# Altium PCB COREV1.1_pcb5_0.PcbDoc (part 12 of 14)
Units mil, origin at the board's own origin, x right, y up, seen from the top; angles counter-clockwise.
Board outline 2860 x 2420 mil, 6 copper layers (Top Layer, GND, SIGNAL_1, SIGNAL_2, POWER, Bottom Layer); 110 components, 241 nets, 882 pads, 697 vias.
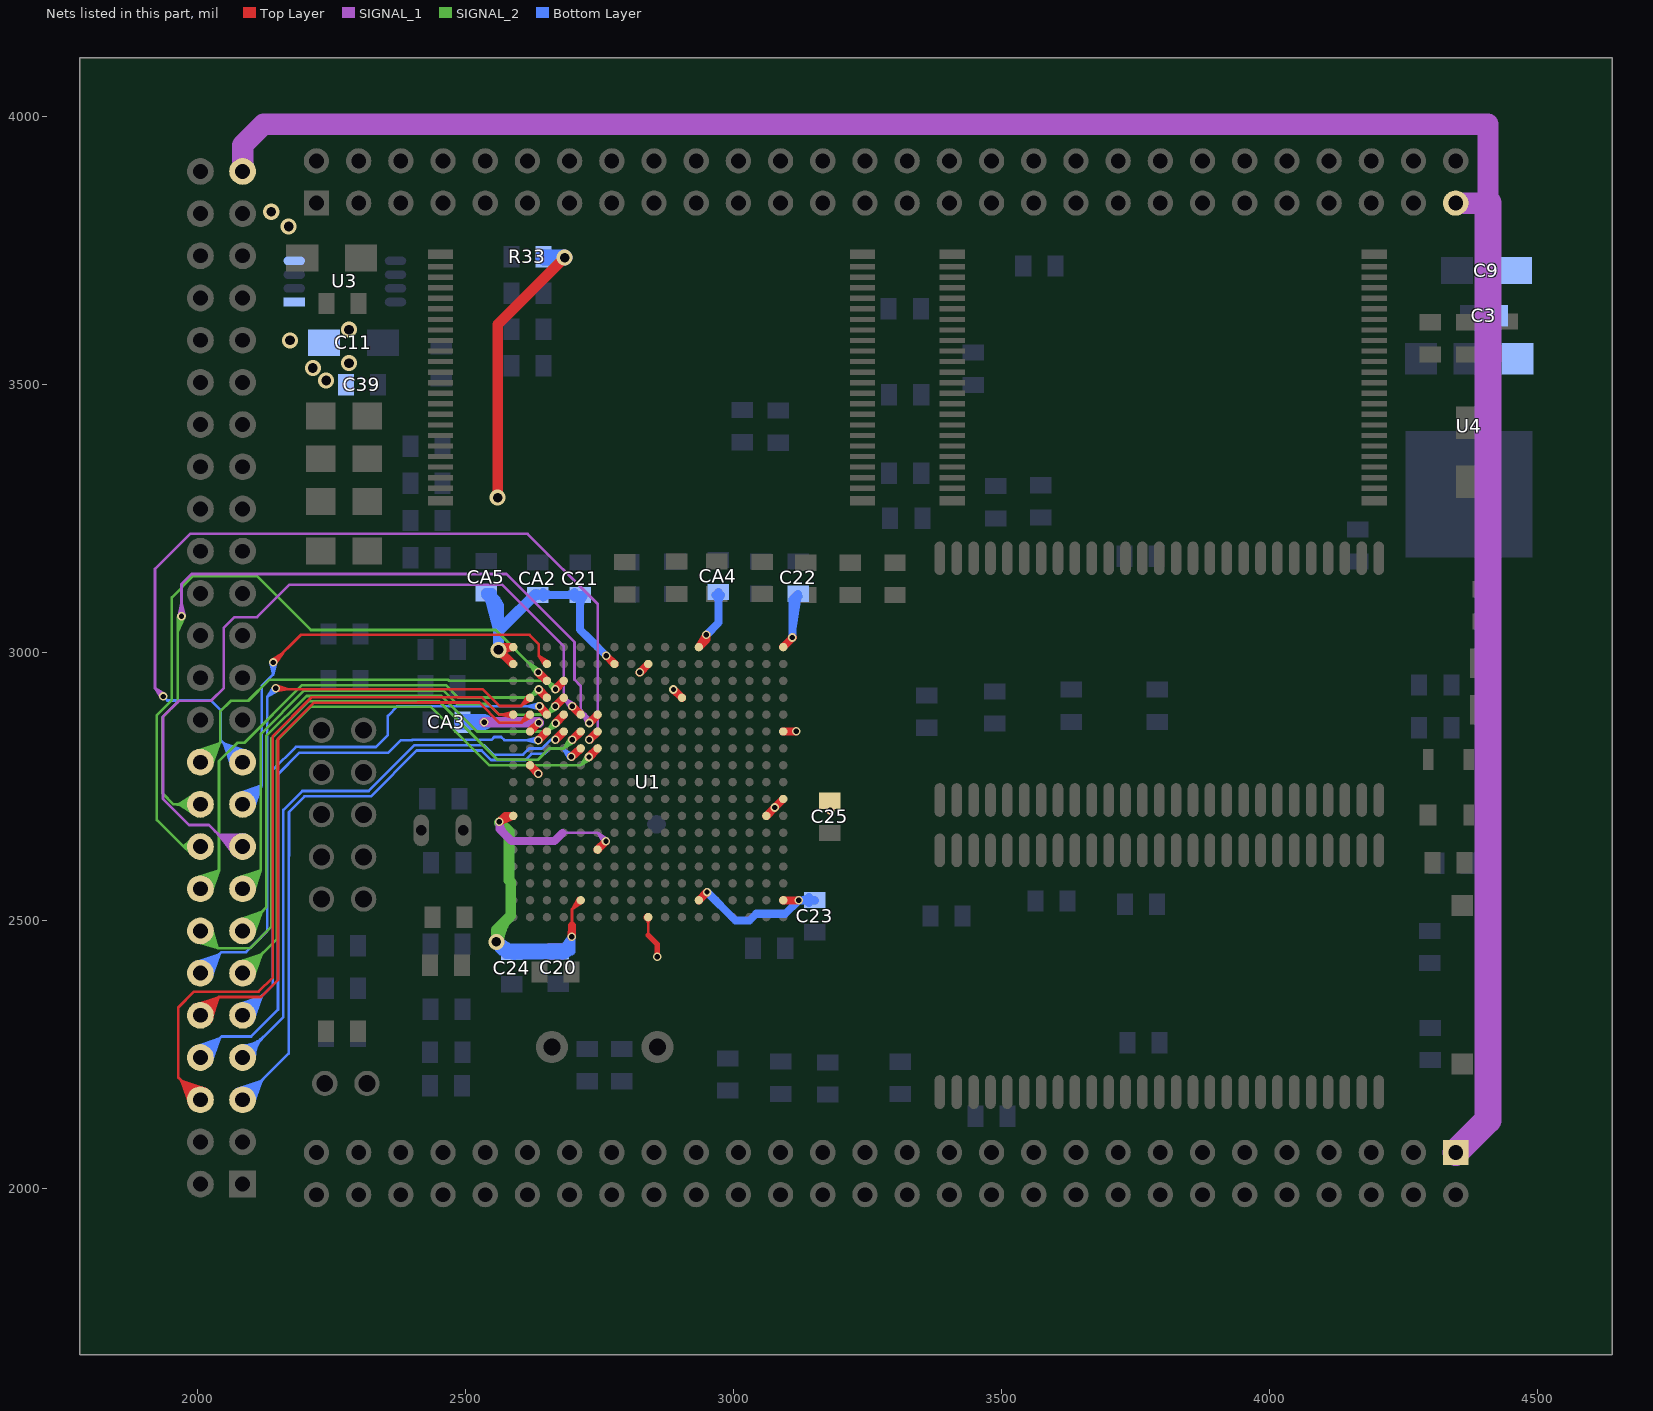
[diagram p16: the nets of this part, all layers, seen from the top]

## Via types
v1: diameter 16, hole 10, Top Layer to Bottom Layer, tented both sides, 638 vias
v2: diameter 30, hole 18, Top Layer to Bottom Layer, tented both sides, 56 vias
v3: diameter 16, hole 10, Top Layer to Bottom Layer, 2 vias
v4: diameter 30, hole 16, Top Layer to Bottom Layer, tented both sides, 1 vias

## Nets (pads, with @x,y where several pads share a name; then routed paths per layer and width w, separated by ;. In a path a pad name is that pad's centre, name@x,y a point inside that pad or via, vN(x,y) a via of type N, cw(c..) or ccw(c..) an arc to the next point about the centre after c; other vN are vias at no path point) (continued)
VD6: pad.PB21 U1.M6 | length 2699.5
  Top Layer w5: v1@2726.67,2840.62 U1.M6@2742.16,2855.92 ; v1@2728.8,2842.27 U1.M6@2749.7,2848.38 ; v1@2731,2842.72 ccw(c2731,2856) 2740.39,2846.61 ccw(c2749.78,2837.22) v1@2736.5,2837.22 ; v1@2734.39,2832.89 U1.M6@2749.7,2848.38 ; v1@2736.04,2835.02 U1.M6@2742.16,2855.92 ; U1.M6@2741.02,2852.62 cw(c2728.05,2852.62) 2737.22,2843.45 cw(c2746.4,2834.27) U1.M6@2746.4,2847.25 ; v1(2731,2837.22) U1.M6@2746.4,2852.62 ; v1(2731,2837.22) U1.M6@2742.16,2855.92 ; v1(2731,2837.22) U1.M6@2749.7,2848.38 ; v1(2731,2837.22) U1.M6@2746.4,2852.62 ; U1.M6@2746.4,2852.62 2735.35,2833.86 U1.M6@2746.4,2852.62 ; U1.M6@2746.4,2852.62 2727.63,2841.57 U1.M6@2746.4,2852.62
  SIGNAL_1 w5: v1@1930.5,2918 ccw(c1917.22,2918) 1926.61,2927.39 ccw(c1936,2936.78) v1@1936,2923.5 ; v1@1931.65,2914.63 1920.5,2933.5 ; v1@1939.37,2922.35 1920.5,2933.5 ; v1@2727.63,2841.57 2746.5,2852.72 ; v1(2731,2837.22) 2746.5,2852.72 ; v1@2731,2842.72 ccw(c2731,2856) 2740.39,2846.61 ccw(c2749.78,2837.22) v1@2736.5,2837.22 ; v1@2735.35,2833.85 2746.5,2852.72 ; 1920.5,2933.5 v1(1936,2918) 1920.5,2933.5 ; 1920.5,2933.5 1920.5,3156.1 1986,3221.6 2615.9,3221.6 2746.5,3091 2746.5,2852.72
  Bottom Layer w5: v1(1936,2918) 1943.62,2910.38 2025.26,2910.38 2043,2892.64 2043,2836.4 pad.PB21@2084,2795.4 ; pad.PB21@2061.5,2795.4 ccw(c2007.18,2795.4) 2045.59,2833.81 ccw(c2084,2872.22) pad.PB21@2084,2817.9 ; pad.PB21@2064.94,2783.45 2048.39,2831.01 ; pad.PB21@2066.5,2795.4 ccw(c2024.25,2795.4) 2054.13,2825.28 ccw(c2084,2855.15) pad.PB21@2084,2812.9 ; pad.PB21@2069.66,2785.37 2048.39,2831.01 ; pad.PB21@2071.5,2795.4 ccw(c2041.32,2795.4) 2062.66,2816.74 ccw(c2084,2838.08) pad.PB21@2084,2807.9 ; pad.PB21@2074.13,2787.73 2048.39,2831.01 ; pad.PB21@2078.32,2790.51 2048.39,2831.01 ; pad.PB21@2088.89,2801.09 2048.39,2831.01 ; pad.PB21@2091.67,2805.27 2048.39,2831.01 ; pad.PB21@2094.04,2809.74 2048.39,2831.01 ; pad.PB21@2095.95,2814.46 2048.39,2831.01
VD7: pad.PB22 U1.P3 | length 1750.9
  Top Layer w5: v1@2663.47,2934.9 U1.P3@2679.17,2950.42 ; v1@2665.57,2936.53 U1.P3@2686.72,2942.88 ; v1@2667.8,2937 ccw(c2667.8,2950.28) 2677.19,2940.89 ccw(c2686.57,2931.5) v1@2673.3,2931.5 ; v1@2671.2,2927.18 U1.P3@2686.72,2942.88 ; v1@2672.83,2929.28 U1.P3@2679.17,2950.42 ; U1.P3@2678.03,2947.11 cw(c2665.06,2947.11) 2674.23,2937.94 cw(c2683.41,2928.76) U1.P3@2683.41,2941.74 ; v1(2667.8,2931.5) U1.P3@2683.41,2947.11 ; v1(2667.8,2931.5) U1.P3@2679.17,2950.42 ; v1(2667.8,2931.5) U1.P3@2686.72,2942.88 ; v1(2667.8,2931.5) U1.P3@2683.41,2947.11 ; U1.P3@2683.41,2947.11 2672.14,2928.13 U1.P3@2683.41,2947.11 ; U1.P3@2683.41,2947.11 2664.42,2935.84 U1.P3@2683.41,2947.11
  SIGNAL_2 w5: pad.PB22@1993.31,2814.46 2040.87,2831.01 ; pad.PB22@1995.22,2809.74 2040.87,2831.01 ; pad.PB22@1997.59,2805.27 2040.87,2831.01 ; pad.PB22@2000.37,2801.09 2040.87,2831.01 ; pad.PB22@2005.26,2795.4 2042,2832.14 ; pad.PB22@2005.66,2807.9 ccw(c2006.52,2834.96) 2025.67,2815.81 ccw(c2044.82,2796.67) pad.PB22@2017.75,2795.8 ; pad.PB22@2005.82,2812.89 ccw(c2007.03,2850.78) 2033.83,2823.98 ccw(c2060.64,2797.17) pad.PB22@2022.75,2795.96 ; pad.PB22@2005.98,2817.89 ccw(c2007.54,2866.6) 2042,2832.14 ; pad.PB22@2010.94,2790.51 2040.87,2831.01 ; pad.PB22@2015.13,2787.73 2040.87,2831.01 ; pad.PB22@2019.6,2785.37 2040.87,2831.01 ; pad.PB22@2024.32,2783.45 2040.87,2831.01 ; pad.PB22@2027.75,2796.12 cw(c2076.46,2797.68) 2042,2832.14 ; v1@2662.3,2931.5 ccw(c2649.02,2931.5) 2658.41,2940.89 ccw(c2667.8,2950.28) v1@2667.8,2937 ; v1@2663.46,2928.11 2651.8,2947.5 ; v1@2671.18,2935.83 2651.8,2947.5 ; 2042,2832.14 2042,2890 2062,2910 2094.5,2910 2133.5,2949 2467.49,2949 2468.99,2947.5 2651.8,2947.5 ; 2651.8,2947.5 v1(2667.8,2931.5) 2651.8,2947.5
VD8: pad.PB19 U1.R2 | length 1663.8
  Top Layer w5: v1@2137.54,2985.77 2159.61,3000.11 v1@2145.27,2978.04 ; v1(2141,2981.5) 2192.5,3033 2619.26,3033 2636.54,3015.72 2636.54,2993.98 ; v1@2141,2987 ccw(c2141,3000.28) 2150.39,2990.89 ccw(c2159.78,2981.5) v1@2146.5,2981.5 ; U1.R2@2646.54,2978.61 ccw(c2633.56,2978.61) 2642.74,2987.78 ccw(c2651.91,2996.95) U1.R2@2651.91,2983.98 ; U1.R2@2647.67,2975.3 2636.54,2993.98 ; U1.R2@2655.21,2982.85 2636.54,2993.98 ; 2636.54,2993.98 U1.R2@2651.91,2978.61 2636.54,2993.98
  Bottom Layer w5: pad.PB19@2072.05,2735.72 2119.61,2752.27 ; pad.PB19@2073.96,2731 2119.61,2752.27 ; pad.PB19@2076.33,2726.53 2119.61,2752.27 ; pad.PB19@2079.11,2722.35 2119.61,2752.27 ; pad.PB19@2084,2716.66 2120,2752.66 ; pad.PB19@2084.59,2729.15 ccw(c2085.79,2754.87) 2104,2736.66 ccw(c2122.21,2718.45) pad.PB19@2096.49,2717.25 ; pad.PB19@2084.82,2734.14 ccw(c2086.51,2770.15) 2112,2744.66 ccw(c2137.49,2719.17) pad.PB19@2101.48,2717.48 ; pad.PB19@2085.05,2739.14 ccw(c2087.23,2785.43) 2120,2752.66 ; pad.PB19@2089.68,2711.77 2119.61,2752.27 ; pad.PB19@2093.87,2708.99 2119.61,2752.27 ; pad.PB19@2098.34,2706.63 2119.61,2752.27 ; pad.PB19@2103.06,2704.71 2119.61,2752.27 ; pad.PB19@2106.48,2717.72 cw(c2152.77,2719.89) 2120,2752.66 ; v1@2135.54,2980.83 2141,2959 ; v1@2137.11,2977.61 cw(c2127.72,2968.22) 2141,2968.22 cw(c2154.28,2968.22) v1@2144.89,2977.61 ; v1(2141,2981.5) 2141,2959 ; v1@2146.46,2980.83 2141,2959 ; 2120,2752.66 2120,2938 2141,2959
VD9: pad.PB20 U1.M5 | length 2598.6
  Top Layer w5: v1@2726.46,2871.9 U1.M5@2742.16,2887.43 ; v1@2728.55,2873.53 U1.M5@2749.71,2879.88 ; v1@2730.78,2874 ccw(c2730.78,2887.28) 2740.17,2877.89 ccw(c2749.56,2868.5) v1@2736.28,2868.5 ; v1@2734.18,2864.18 U1.M5@2749.71,2879.88 ; v1@2735.81,2866.27 U1.M5@2742.16,2887.43 ; U1.M5@2741.02,2884.12 cw(c2728.05,2884.12) 2737.22,2874.94 cw(c2746.4,2865.77) U1.M5@2746.4,2878.74 ; v1(2730.78,2868.5) U1.M5@2746.4,2884.12 ; v1(2730.78,2868.5) U1.M5@2742.16,2887.43 ; v1(2730.78,2868.5) U1.M5@2749.71,2879.88 ; v1(2730.78,2868.5) U1.M5@2746.4,2884.12 ; U1.M5@2746.4,2884.12 2735.12,2865.13 U1.M5@2746.4,2884.12 ; U1.M5@2746.4,2884.12 2727.41,2872.84 U1.M5@2746.4,2884.12
  SIGNAL_1 w5: v1@1964.54,3068.66 1970,3091 v1@1975.46,3068.66 ; v1@1966.11,3071.89 ccw(c1956.72,3081.28) 1970,3081.28 ccw(c1983.28,3081.28) v1@1973.89,3071.89 ; v1(1970,3068) 1970,3128 1988.6,3146.6 2576.44,3146.6 2703.5,3019.55 2703.5,2949.42 2714.9,2938.02 2714.9,2893.69 2730.78,2877.82 v1(2730.78,2868.5) 2716.49,2892.11 ; 2714.8,2893.79 cw(c2689.51,2868.5) v1@2725.28,2868.5 ; 2723.34,2885.26 cw(c2706.58,2868.5) v1@2730.28,2868.5 ; v1@2725.81,2866.13 2716.49,2892.11 ; 2731.87,2876.72 cw(c2723.65,2868.5) v1@2735.28,2868.5 ; v1@2735.18,2871.8 2716.49,2892.11
  SIGNAL_2 w5: 1962.76,3037.24 cw(c2000.76,3037.24) v1@1973.89,3064.11 ; 1962.76,3049.31 cw(c1988.69,3049.31) v1@1970.35,3067.65 ; 1962.76,3061.39 cw(c1976.61,3061.39) v1@1966.82,3071.18 ; v1@1964.56,3068.83 1962.76,3038.84 ; v1@1975.19,3066.19 1962.76,3038.84 ; pad.PB20@1988.4,2701.76 ccw(c1955.34,2672.54) 1955.34,2716.66 ; pad.PB20@1988.4,2731.56 cw(c1955.34,2760.79) 1955.34,2716.66 ; pad.PB20@1992.15,2705.07 ccw(c1966.43,2682.34) 1966.43,2716.66 ccw(c1966.43,2750.98) pad.PB20@1992.15,2728.25 ; pad.PB20@1995.89,2708.38 ccw(c1977.53,2692.15) 1977.53,2716.66 ccw(c1977.53,2741.18) pad.PB20@1995.89,2724.94 ; pad.PB20@1998.93,2695.07 1965.26,2716.66 ; pad.PB20@1998.93,2738.25 1965.26,2716.66 ; pad.PB20@2001.43,2699.59 1965.26,2716.66 ; pad.PB20@2001.43,2733.74 1965.26,2716.66 ; pad.PB20@2003.31,2704.32 1965.26,2716.66 ; pad.PB20@2003.31,2729.01 1965.26,2716.66 ; pad.PB20@2004.56,2709.2 1965.26,2716.66 ; pad.PB20@2004.56,2724.13 1965.26,2716.66 ; pad.PB20@2005.26,2716.66 1955.34,2716.66 ; 1955.34,2716.66 1934,2738 1934,2878.86 1962.76,2907.62 1962.76,3060.76 v1(1970,3068) 1962.76,3038.84
VD10: pad.PB17 U1.N5 | length 2491.8
  Top Layer w5: v1@2694.7,2896.59 U1.N5@2710.67,2880.8 ; v1@2696.76,2894.98 U1.N5@2718.22,2888.35 ; v1@2699.02,2894.5 cw(c2699.02,2881.22) 2708.41,2890.61 cw(c2717.8,2900) v1@2704.52,2900 ; v1@2702.43,2904.32 U1.N5@2718.22,2888.35 ; v1@2704.04,2902.26 U1.N5@2710.67,2880.8 ; U1.N5@2709.53,2884.12 ccw(c2696.55,2884.12) 2705.73,2893.29 ccw(c2714.9,2902.47) U1.N5@2714.9,2889.49 ; v1(2699.02,2900) U1.N5@2714.9,2884.12 ; v1(2699.02,2900) U1.N5@2718.22,2888.35 ; v1(2699.02,2900) U1.N5@2710.67,2880.8 ; v1(2699.02,2900) U1.N5@2714.9,2884.12 ; U1.N5@2714.9,2884.12 2695.64,2895.66 U1.N5@2714.9,2884.12 ; U1.N5@2714.9,2884.12 2703.36,2903.38 U1.N5@2714.9,2884.12
  SIGNAL_1 w5: 2032.46,2666.54 ccw(c2059.58,2693.65) pad.PB17@2074.97,2658.53 ; 2037.64,2661.36 ccw(c2062.73,2686.46) pad.PB17@2076.98,2653.95 ; 2042.82,2656.18 ccw(c2065.89,2679.26) pad.PB17@2078.98,2649.37 ; 2047.99,2651.01 ccw(c2069.04,2672.06) pad.PB17@2080.99,2644.79 ; 2053.17,2645.83 ccw(c2072.2,2664.86) pad.PB17@2083,2640.21 ; 2058.35,2640.65 ccw(c2075.35,2657.66) pad.PB17@2085,2635.63 ; pad.PB17@2069.82,2620.46 2039.13,2659.87 ; pad.PB17@2073.68,2623.79 2039.13,2659.87 ; pad.PB17@2077.15,2627.47 2039.13,2659.87 ; pad.PB17@2080.21,2631.45 2039.13,2659.87 ; pad.PB17@2086.78,2644.89 2039.13,2659.87 ; pad.PB17@2088.04,2649.75 2039.13,2659.87 ; pad.PB17@2088.82,2654.75 2039.13,2659.87 ; pad.PB17@2089.08,2659.84 2039.13,2659.87 ; v1@2693.52,2900 ccw(c2680.24,2900) 2689.63,2909.39 ccw(c2699.02,2918.78) v1@2699.02,2905.5 ; v1@2694.67,2896.63 2683.5,2915.52 ; v1@2702.39,2904.35 2683.5,2915.52 ; 2039.13,2659.87 pad.PB17@2084,2637.92 2061.08,2637.92 2021,2678 1984,2678 1935.5,2726.5 1935.5,2880.36 1965.14,2910 2025,2910 2049,2934 2049,3046.5 2068.5,3066 2110.86,3066 2171.46,3126.6 2568.16,3126.6 2683.5,3011.26 2683.5,2915.52 ; 2683.5,2915.52 v1(2699.02,2900) 2683.5,2915.52
VD11: pad.PB18 U1.R3 | length 1998.5
  Top Layer w5: v1@2631.25,2959.51 U1.R3@2647.74,2943.72 ; v1@2632.12,2958.66 U1.R3@2651.39,2947.11 ; v1@2632.18,2958.62 U1.R3@2651.91,2947.11 ; v1@2633.29,2957.96 U1.R3@2655.17,2951.38 ; v1@2635.5,2957.5 cw(c2635.5,2944.22) 2644.89,2953.61 cw(c2654.28,2963) v1@2641,2963 ; v1@2638.85,2967.36 U1.R3@2655.17,2951.38 ; v1@2639.77,2966.46 U1.R3@2651.91,2947.11 ; v1@2639.84,2966.38 U1.R3@2651.39,2947.11 ; v1@2640.46,2965.37 U1.R3@2647.74,2943.72 ; 2641.85,2956.65 ccw(c2651.91,2966.71) U1.R3@2651.91,2952.48 ; 2643.1,2955.4 cw(c2634.82,2947.11) U1.R3@2646.54,2947.11 ; v1(2635.5,2963) U1.R3@2651.91,2947.11 ; v1(2635.5,2963) U1.R3@2655.17,2951.38 ; v1(2635.5,2963) U1.R3@2647.74,2943.72 ; v1(2635.5,2963) U1.R3@2651.39,2947.11 ; U1.R3@2651.39,2947.11 U1.R3@2651.91,2947.11
  SIGNAL_2 w5: pad.PB18@1984.01,2630.52 ccw(c1973.6,2626.9) 1973.6,2637.92 ; pad.PB18@1984.01,2645.32 cw(c1973.6,2648.95) 1973.6,2637.92 ; pad.PB18@1997.27,2616.89 1973.6,2637.92 ; pad.PB18@1997.27,2658.95 1973.6,2637.92 ; pad.PB18@2000.42,2621.1 1973.6,2637.92 ; pad.PB18@2000.42,2654.74 1973.6,2637.92 ; pad.PB18@2002.79,2625.67 1973.6,2637.92 ; pad.PB18@2002.79,2650.18 1973.6,2637.92 ; pad.PB18@2004.37,2630.47 1973.6,2637.92 ; pad.PB18@2004.37,2645.37 1973.6,2637.92 ; pad.PB18@2005.26,2637.92 1973.6,2637.92 ; v1@2630,2963 ccw(c2616.72,2963) 2626.11,2972.39 ccw(c2635.5,2981.78) v1@2635.5,2968.5 ; v1@2631.23,2959.54 2616.89,2981.61 ; v1@2638.96,2967.27 2616.89,2981.61 ; 1973.6,2637.92 1924,2687.52 1924,2883 1952,2911 1952,3103.06 1991.8,3142.86 2110.5,3142.86 2211.25,3042.11 2556.39,3042.11 v1(2635.5,2963) 2616.89,2981.61
VD12: pad.PB15 U1.P4 | length 1858.7
  Top Layer w5: v1@2662.97,2902.91 U1.P4@2679.18,2918.94 ; v1@2665,2904.5 U1.P4@2686.73,2911.39 ; v1@2667.28,2904.99 ccw(c2667.28,2918.27) 2676.67,2908.88 ccw(c2686.06,2899.49) v1@2672.78,2899.49 ; v1@2670.7,2895.18 U1.P4@2686.73,2911.39 ; v1@2672.29,2897.21 U1.P4@2679.18,2918.94 ; U1.P4@2678.03,2915.61 cw(c2665.06,2915.61) 2674.23,2906.44 cw(c2683.41,2897.27) U1.P4@2683.41,2910.24 ; v1(2667.28,2899.49) U1.P4@2683.41,2915.61 ; v1(2667.28,2899.49) U1.P4@2679.18,2918.94 ; v1(2667.28,2899.49) U1.P4@2686.73,2911.39 ; v1(2667.28,2899.49) U1.P4@2683.41,2915.61 ; U1.P4@2683.41,2915.61 2671.61,2896.1 U1.P4@2683.41,2915.61 ; U1.P4@2683.41,2915.61 2663.89,2903.82 U1.P4@2683.41,2915.61
  SIGNAL_2 w5: pad.PB15@2072.25,2578.37 2118,2593.18 ; pad.PB15@2074.08,2573.6 2118,2593.18 ; pad.PB15@2076.39,2569.09 2118,2593.18 ; pad.PB15@2079.13,2564.88 2118,2593.18 ; pad.PB15@2084,2559.18 2118,2593.18 ; pad.PB15@2085.12,2571.63 ccw(c2087.13,2593.83) 2102.89,2578.07 ccw(c2118.65,2562.31) pad.PB15@2096.45,2560.31 ; pad.PB15@2085.57,2576.61 ccw(c2088.38,2607.69) 2110.44,2585.62 ccw(c2132.51,2563.56) pad.PB15@2101.43,2560.75 ; pad.PB15@2086.02,2581.59 ccw(c2089.63,2621.55) 2118,2593.18 ; pad.PB15@2089.7,2554.31 2118,2593.18 ; pad.PB15@2093.91,2551.57 2118,2593.18 ; pad.PB15@2098.42,2549.27 2118,2593.18 ; pad.PB15@2103.19,2547.44 2118,2593.18 ; pad.PB15@2106.41,2561.2 cw(c2146.37,2564.81) 2118,2593.18 ; v1@2661.78,2899.49 cw(c2648.51,2899.49) 2657.89,2890.1 cw(c2667.28,2880.71) v1@2667.28,2893.99 ; v1@2662.92,2902.84 2652.29,2884.5 ; v1@2670.64,2895.13 2652.29,2884.5 ; 2118,2593.18 2118,2848.04 2198.96,2929 2459.21,2929 2484.21,2904 2542.65,2904 2562.66,2883.99 2629.86,2883.99 2630.37,2884.5 2652.29,2884.5 ; 2652.29,2884.5 v1(2667.28,2899.49) 2652.29,2884.5
VD13: pad.PB16 U1.R4 | length 1875.8
  Top Layer w5: v1@2632.19,2927.61 U1.R4@2647.67,2912.31 ; v1@2634.33,2925.96 U1.R4@2655.21,2919.85 ; v1@2636.52,2925.5 cw(c2636.52,2912.22) 2645.91,2921.61 cw(c2655.3,2931) v1@2642.02,2931 ; v1@2639.92,2935.33 U1.R4@2655.21,2919.85 ; v1@2641.57,2933.2 U1.R4@2647.67,2912.31 ; U1.R4@2646.54,2915.61 ccw(c2633.56,2915.61) 2642.74,2924.79 ccw(c2651.91,2933.96) U1.R4@2651.91,2920.99 ; v1(2636.52,2931) U1.R4@2651.91,2915.61 ; v1(2636.52,2931) U1.R4@2655.21,2919.85 ; v1(2636.52,2931) U1.R4@2647.67,2912.31 ; v1(2636.52,2931) U1.R4@2651.91,2915.61 ; U1.R4@2651.91,2915.61 2633.16,2926.65 U1.R4@2651.91,2915.61 ; U1.R4@2651.91,2915.61 2640.87,2934.37 U1.R4@2651.91,2915.61
  SIGNAL_2 w5: pad.PB16@1993.42,2578.31 2040,2593.92 ; pad.PB16@1995.29,2573.56 2040,2593.92 ; pad.PB16@1997.62,2569.07 2040,2593.92 ; pad.PB16@2000.38,2564.87 2040,2593.92 ; pad.PB16@2005.26,2559.18 2040,2593.92 ; pad.PB16@2006.18,2571.65 ccw(c2007.91,2595.13) 2024.56,2578.48 ccw(c2041.21,2561.83) pad.PB16@2017.73,2560.1 ; pad.PB16@2006.55,2576.63 ccw(c2008.97,2609.51) 2032.28,2586.2 ccw(c2055.59,2562.89) pad.PB16@2022.71,2560.47 ; pad.PB16@2006.91,2581.62 ccw(c2010.03,2623.89) 2040,2593.92 ; pad.PB16@2010.95,2554.3 2040,2593.92 ; pad.PB16@2015.15,2551.54 2040,2593.92 ; pad.PB16@2019.64,2549.21 2040,2593.92 ; pad.PB16@2024.39,2547.34 2040,2593.92 ; pad.PB16@2027.7,2560.84 cw(c2069.97,2563.95) 2040,2593.92 ; 2625.15,2920.79 cw(c2636.52,2909.42) v1@2636.52,2925.5 ; 2627.96,2923.59 ccw(c2620.55,2931) v1@2631.02,2931 ; v1@2632.31,2934.53 2620.36,2916 ; v1@2639.73,2926.53 2620.36,2916 ; 2040,2593.92 2040,2797.36 2074.28,2831.64 2087.46,2831.64 2194.82,2939 2463.35,2939 2486.35,2916 2620.36,2916 ; 2620.36,2916 v1(2636.52,2931) 2635.36,2931 2620.36,2916
VD14: pad.PB13 U1.P5 | length 2071.7
  Top Layer w5: v1@2663.6,2871.31 U1.P5@2679.17,2887.42 ; v1@2665.65,2872.97 U1.P5@2686.71,2879.88 ; v1@2668,2873.5 ccw(c2668,2885.06) 2676.17,2876.89 ; v1@2671.5,2863.76 U1.P5@2686.71,2879.88 ; v1@2673.07,2865.86 U1.P5@2679.17,2887.42 ; v1@2673.5,2868 cw(c2688.5,2868) U1.P5@2677.89,2878.6 ; U1.P5@2678.03,2884.12 cw(c2665.06,2884.12) 2674.23,2874.94 cw(c2683.41,2865.77) U1.P5@2683.41,2878.74 ; v1(2668,2868) U1.P5@2683.41,2884.12 ; v1(2668,2868) U1.P5@2679.17,2887.42 ; v1(2668,2868) U1.P5@2686.71,2879.88 ; v1(2668,2868) U1.P5@2683.41,2884.12 ; v1(2668,2868) v1@2668,2868.71 ; v1@2668,2868.71 U1.P5@2683.41,2884.12 ; v1@2668,2868.71 U1.P5@2679.17,2887.42 ; v1@2668,2868.71 U1.P5@2686.71,2879.88 ; v1@2668,2868.71 U1.P5@2683.41,2884.12 ; U1.P5@2683.41,2884.12 2672.41,2864.72 U1.P5@2683.41,2884.12 ; U1.P5@2683.41,2884.12 2664.52,2872.26 U1.P5@2683.41,2884.12
  SIGNAL_2 w5: pad.PB13@2072.05,2499.5 2119.61,2516.05 ; pad.PB13@2073.96,2494.78 2119.61,2516.05 ; pad.PB13@2076.33,2490.31 2119.61,2516.05 ; pad.PB13@2079.11,2486.12 2119.61,2516.05 ; pad.PB13@2084,2480.44 2128,2524.44 2128,2843.9 2203.1,2919 2455.07,2919 2521.53,2852.53 2652.53,2852.53 ; pad.PB13@2084,2492.94 ccw(c2084,2523.12) 2105.34,2501.78 ccw(c2126.68,2480.44) pad.PB13@2096.5,2480.44 ; pad.PB13@2084,2497.94 ccw(c2084,2540.19) 2113.87,2510.31 ccw(c2143.75,2480.44) pad.PB13@2101.5,2480.44 ; pad.PB13@2084,2502.94 ccw(c2084,2557.26) 2122.41,2518.85 ccw(c2160.82,2480.44) pad.PB13@2106.5,2480.44 ; pad.PB13@2089.68,2475.55 2119.61,2516.05 ; pad.PB13@2093.87,2472.77 2119.61,2516.05 ; pad.PB13@2098.34,2470.4 2119.61,2516.05 ; pad.PB13@2103.06,2468.49 2119.61,2516.05 ; v1@2662.5,2868 cw(c2649.22,2868) 2658.61,2858.61 cw(c2668,2849.22) v1@2668,2862.5 ; v1@2663.65,2871.37 2652.53,2852.53 ; v1@2671.37,2863.65 2652.53,2852.53 ; 2652.53,2852.53 v1(2668,2868) 2652.53,2852.53
VD15: pad.PB14 U1.N6 | length 2081
  Top Layer w5: v1@2694.71,2840.44 U1.N6@2710.7,2855.97 ; v1@2696.8,2842.04 U1.N6@2718.18,2848.36 ; v1@2699,2842.5 ccw(c2699,2855.78) 2708.39,2846.39 ccw(c2717.78,2837) v1@2704.5,2837 ; v1@2702.37,2832.65 U1.N6@2718.18,2848.36 ; v1@2703.31,2833.58 U1.N6@2714.9,2852.62 ; v1@2703.34,2833.63 U1.N6@2714.62,2852.62 ; v1@2704,2834.71 U1.N6@2710.7,2855.97 ; 2705.25,2843.25 cw(c2714.9,2833.6) U1.N6@2714.9,2847.25 ; 2705.93,2843.93 ccw(c2697.23,2852.62) U1.N6@2709.53,2852.62 ; v1(2699,2837) U1.N6@2714.9,2852.62 ; v1(2699,2837) U1.N6@2710.7,2855.97 ; v1(2699,2837) U1.N6@2718.18,2848.36 ; v1(2699,2837) U1.N6@2714.62,2852.62 ; U1.N6@2714.62,2852.62 2695.63,2841.34 U1.N6@2714.9,2852.62 ; U1.N6@2714.62,2852.62 U1.N6@2714.9,2852.62
  SIGNAL_2 w5: pad.PB14@1993.73,2461.12 2037.76,2447.94 ; pad.PB14@1995.47,2465.94 2037.76,2447.94 ; pad.PB14@1997.71,2470.48 2037.76,2447.94 ; pad.PB14@2000.41,2474.72 2037.76,2447.94 ; pad.PB14@2005.26,2480.44 2037.76,2447.94 ; pad.PB14@2006.82,2468.04 cw(c2009.29,2448.36) 2023.31,2462.39 cw(c2037.34,2476.41) pad.PB14@2017.66,2478.88 ; pad.PB14@2007.44,2463.08 cw(c2010.91,2435.53) 2030.54,2455.16 cw(c2050.16,2474.79) pad.PB14@2022.62,2478.26 ; pad.PB14@2008.07,2458.12 cw(c2012.52,2422.71) 2037.76,2447.94 ; pad.PB14@2010.98,2485.29 2037.76,2447.94 ; pad.PB14@2015.22,2487.99 2037.76,2447.94 ; pad.PB14@2019.76,2490.23 2037.76,2447.94 ; pad.PB14@2024.58,2491.97 2037.76,2447.94 ; pad.PB14@2027.58,2477.63 ccw(c2062.99,2473.18) 2037.76,2447.94 ; v1@2693.5,2837 cw(c2680.22,2837) 2689.61,2827.61 cw(c2699,2818.22) v1@2699,2831.5 ; v1@2694.67,2840.39 2683,2821 ; v1@2702.39,2832.67 2683,2821 ; 2037.76,2447.94 2097.46,2447.94 2138,2488.48 2138,2839.75 2207.25,2909 2450.93,2909 2560.05,2799.88 2634.88,2799.88 2656,2821 2683,2821 ; 2683,2821 v1(2699,2837) 2683,2821
VD16: pad.PB11 U1.M7 | length 2122.2
  Top Layer w5: v1@2725.97,2808.42 U1.M7@2742.18,2824.45 ; v1@2727.99,2810.01 U1.M7@2749.72,2816.9 ; v1@2730.28,2810.5 ccw(c2730.28,2823.78) 2739.67,2814.39 ccw(c2749.05,2805) v1@2735.78,2805 ; v1@2733.69,2800.69 U1.M7@2749.72,2816.9 ; v1@2735.28,2802.72 U1.M7@2742.18,2824.45 ; U1.M7@2741.02,2821.13 cw(c2728.05,2821.13) 2737.22,2811.95 cw(c2746.4,2802.78) U1.M7@2746.4,2815.75 ; v1(2730.28,2805) U1.M7@2746.4,2821.13 ; v1(2730.28,2805) U1.M7@2742.18,2824.45 ; v1(2730.28,2805) U1.M7@2749.72,2816.9 ; v1(2730.28,2805) U1.M7@2746.4,2821.13 ; U1.M7@2746.4,2821.13 2734.61,2801.61 U1.M7@2746.4,2821.13 ; U1.M7@2746.4,2821.13 2726.88,2809.33 U1.M7@2746.4,2821.13
  SIGNAL_2 w5: pad.PB11@2072.05,2420.76 2119.61,2437.31 ; pad.PB11@2073.96,2416.04 2119.61,2437.31 ; pad.PB11@2076.33,2411.57 2119.61,2437.31 ; pad.PB11@2079.11,2407.38 2119.61,2437.31 ; pad.PB11@2084,2401.7 2148,2465.7 2148,2835.61 2211.39,2899 2435,2899 2544.12,2789.88 2715.15,2789.88 ; pad.PB11@2084,2414.2 ccw(c2084,2444.38) 2105.34,2423.04 ccw(c2126.68,2401.7) pad.PB11@2096.5,2401.7 ; pad.PB11@2084,2419.2 ccw(c2084,2461.45) 2113.87,2431.57 ccw(c2143.75,2401.7) pad.PB11@2101.5,2401.7 ; pad.PB11@2084,2424.2 ccw(c2084,2478.52) 2122.41,2440.11 ccw(c2160.82,2401.7) pad.PB11@2106.5,2401.7 ; pad.PB11@2089.68,2396.81 2119.61,2437.31 ; pad.PB11@2093.87,2394.03 2119.61,2437.31 ; pad.PB11@2098.34,2391.66 2119.61,2437.31 ; pad.PB11@2103.06,2389.75 2119.61,2437.31 ; v1@2724.78,2805 cw(c2711.5,2805) 2720.89,2795.61 cw(c2730.28,2786.23) v1@2730.28,2799.5 ; v1@2725.92,2808.36 2715.15,2789.88 ; v1@2733.63,2800.65 2715.15,2789.88 ; 2715.15,2789.88 v1(2730.28,2805) 2715.15,2789.88
VD17: pad.PB12 U1.T4 | length 1977.3
  Top Layer w5: v1(2146,2933) 2169.11,2931.74 ; v1@2146.35,2927.51 2169.11,2931.74 ; v1@2146.95,2938.42 2169.11,2931.74 ; v1@2147.26,2931.74 2532,2931.74 2563.5,2900.24 2604.29,2900.24 ; v1@2149.89,2929.11 cw(c2156.23,2922.77) 2156.23,2931.74 ; v1@2149.89,2936.89 ccw(c2162.33,2949.33) 2162.33,2931.74 ; 2609.96,2905.91 cw(c2620.41,2895.46) U1.T4@2620.41,2910.24 ; 2611.77,2907.72 ccw(c2603.87,2915.61) U1.T4@2615.04,2915.61 ; U1.T4@2616.26,2919.03 2604.29,2900.24 ; U1.T4@2623.62,2911.31 2604.29,2900.24 ; 2604.29,2900.24 U1.T4@2620.41,2915.61 2619.66,2915.61 2604.29,2900.24
  Bottom Layer w5: pad.PB12@1993.31,2420.76 2040.87,2437.31 ; pad.PB12@1995.22,2416.04 2040.87,2437.31 ; pad.PB12@1997.59,2411.57 2040.87,2437.31 ; pad.PB12@2000.37,2407.38 2040.87,2437.31 ; pad.PB12@2005.26,2401.7 2044.36,2440.8 2090.32,2440.8 2130,2480.48 2130,2917 ; pad.PB12@2005.26,2414.2 ccw(c2005.26,2444.38) 2026.6,2423.04 ccw(c2047.94,2401.7) pad.PB12@2017.76,2401.7 ; pad.PB12@2005.26,2419.2 ccw(c2005.26,2461.45) 2035.13,2431.57 ccw(c2065.01,2401.7) pad.PB12@2022.76,2401.7 ; pad.PB12@2005.26,2424.2 ccw(c2005.26,2478.52) 2043.67,2440.11 ccw(c2082.08,2401.7) pad.PB12@2027.76,2401.7 ; pad.PB12@2010.94,2396.81 2040.87,2437.31 ; pad.PB12@2015.13,2394.03 2040.87,2437.31 ; pad.PB12@2019.6,2391.66 2040.87,2437.31 ; pad.PB12@2024.32,2389.75 2040.87,2437.31 ; v1@2140.5,2933 cw(c2127.22,2933) 2136.61,2923.61 cw(c2146,2914.22) v1@2146,2927.5 ; v1@2141.67,2936.39 2130,2917 ; v1@2149.39,2928.67 2130,2917 ; 2130,2917 v1(2146,2933) 2130,2917
VD18: pad.PB9 U1.R5 | length 2010.6
  Top Layer w5: v1@2633.44,2896.92 U1.R5@2647.45,2881.12 ; v1@2634.37,2895.87 U1.R5@2651.91,2884.12 ; v1@2634.73,2895.58 U1.R5@2651.16,2886.84 ; v1@2635.53,2895.09 U1.R5@2655.47,2888.14 ; v1@2638,2894.5 cw(c2638,2881.22) 2647.39,2890.61 cw(c2656.78,2900) v1@2643.5,2900 ; v1@2638,2898.03 v1(2638,2900) ; v1@2641.34,2896.66 cw(c2628.8,2884.12) U1.R5@2646.54,2884.12 ; v1@2641.66,2904.11 U1.R5@2655.47,2888.14 ; v1@2642.42,2903.27 U1.R5@2651.16,2886.84 ; v1@2642.57,2903.05 U1.R5@2651.91,2884.12 ; v1@2643.2,2901.8 U1.R5@2647.45,2881.12 ; 2646.1,2891.9 ccw(c2651.91,2897.71) U1.R5@2651.91,2889.49 ; v1(2638,2900) U1.R5@2651.91,2884.12 ; v1(2638,2900) U1.R5@2655.47,2888.14 ; v1(2638,2900) U1.R5@2647.45,2881.12 ; v1(2638,2900) U1.R5@2651.16,2886.84 ; U1.R5@2651.16,2886.84 2651.16,2884.12 U1.R5@2651.91,2884.12
  Bottom Layer w5: pad.PB9@2072.05,2342.02 2119.61,2358.57 ; pad.PB9@2073.96,2337.3 2119.61,2358.57 ; pad.PB9@2076.33,2332.83 2119.61,2358.57 ; pad.PB9@2079.11,2328.64 2119.61,2358.57 ; pad.PB9@2084,2322.96 2140,2378.96 2140,2780.5 2183.43,2823.93 2191.71,2823.93 2191.85,2823.79 2332.79,2823.79 2355,2846 2355,2881.75 2373.25,2900 v1(2638,2900) ; pad.PB9@2084,2335.46 ccw(c2084,2365.64) 2105.34,2344.3 ccw(c2126.68,2322.96) pad.PB9@2096.5,2322.96 ; pad.PB9@2084,2340.46 ccw(c2084,2382.71) 2113.87,2352.83 ccw(c2143.75,2322.96) pad.PB9@2101.5,2322.96 ; pad.PB9@2084,2345.46 ccw(c2084,2399.78) 2122.41,2361.37 ccw(c2160.82,2322.96) pad.PB9@2106.5,2322.96 ; pad.PB9@2089.68,2318.07 2119.61,2358.57 ; pad.PB9@2093.87,2315.29 2119.61,2358.57 ; pad.PB9@2098.34,2312.92 2119.61,2358.57 ; pad.PB9@2103.06,2311.01 2119.61,2358.57 ; v1@2634.11,2896.11 ccw(c2624.72,2886.72) 2624.72,2900 ccw(c2624.72,2913.28) v1@2634.11,2903.89 ; v1@2637.34,2894.54 2615,2900 v1@2637.34,2905.46
VD19: pad.PB10 U1.T5 | length 1779.5
  Top Layer w5: pad.PB10@1993.51,2342.15 2039.3,2357 ; pad.PB10@1995.34,2337.38 2039.3,2357 ; pad.PB10@1997.64,2332.87 2039.3,2357 ; pad.PB10@2000.39,2328.66 2039.3,2357 ; pad.PB10@2005.26,2322.96 2039.3,2357 ; pad.PB10@2006.37,2335.41 ccw(c2008.36,2357.68) 2024.17,2341.87 ccw(c2039.98,2326.06) pad.PB10@2017.71,2324.07 ; pad.PB10@2006.82,2340.39 ccw(c2009.6,2371.57) 2031.73,2349.43 ccw(c2053.87,2327.3) pad.PB10@2022.69,2324.52 ; pad.PB10@2007.26,2345.37 ccw(c2010.84,2385.45) 2039.3,2357 ; pad.PB10@2010.96,2318.09 2039.3,2357 ; pad.PB10@2015.17,2315.34 2039.3,2357 ; pad.PB10@2019.68,2313.04 2039.3,2357 ; pad.PB10@2024.45,2311.21 2039.3,2357 ; pad.PB10@2027.67,2324.96 cw(c2067.75,2328.54) 2039.3,2357 ; 2411,2906.5 2217,2906.5 2150,2839.5 2150,2388.86 2118.14,2357 2039.3,2357 ; 2411,2906.64 2525.87,2906.64 2563.77,2868.74 2604.29,2868.74 ; 2609.96,2874.42 cw(c2620.41,2863.96) U1.T5@2620.41,2878.74 ; 2611.77,2876.22 ccw(c2603.87,2884.12) U1.T5@2615.04,2884.12 ; U1.T5@2616.26,2887.53 2604.29,2868.74 ; U1.T5@2623.62,2879.81 2604.29,2868.74 ; 2604.29,2868.74 U1.T5@2620.41,2884.12 2619.66,2884.12 2604.29,2868.74
VD20: pad.PB7 U1.P6 | length 1575.2
  Top Layer w5: v1@2663.46,2840.4 U1.P6@2679.17,2855.93 ; v1@2665.56,2842.03 U1.P6@2686.72,2848.39 ; v1@2667.78,2842.5 ccw(c2667.78,2855.78) 2677.17,2846.39 ccw(c2686.56,2837) v1@2673.28,2837 ; v1@2671.18,2832.68 U1.P6@2686.72,2848.39 ; v1@2672.81,2834.77 U1.P6@2679.17,2855.93 ; U1.P6@2678.03,2852.62 cw(c2665.06,2852.62) 2674.23,2843.45 cw(c2683.41,2834.27) U1.P6@2683.41,2847.25 ; v1(2667.78,2837) U1.P6@2683.41,2852.62 ; v1(2667.78,2837) U1.P6@2679.17,2855.93 ; v1(2667.78,2837) U1.P6@2686.72,2848.39 ; v1(2667.78,2837) U1.P6@2683.41,2852.62 ; U1.P6@2683.41,2852.62 2672.13,2833.63 U1.P6@2683.41,2852.62 ; U1.P6@2683.41,2852.62 2664.41,2841.34 U1.P6@2683.41,2852.62
  Bottom Layer w5: pad.PB7@2084,2244.22 2160,2320.22 2160,2706 2195.5,2741.5 2319.24,2741.5 2404.74,2827 2534.43,2827 2551.93,2809.5 2607.43,2809.5 2618.93,2821 2642.86,2821 2658.86,2837 v1(2667.78,2837) ; pad.PB7@2084,2256.72 ccw(c2084,2286.9) 2105.34,2265.56 ccw(c2126.68,2244.22) pad.PB7@2096.5,2244.22 ; pad.PB7@2084,2261.72 ccw(c2084,2303.97) 2113.87,2274.09 ccw(c2143.75,2244.22) pad.PB7@2101.5,2244.22 ; pad.PB7@2084,2266.72 ccw(c2084,2321.04) 2122.41,2282.63 ccw(c2160.82,2244.22) pad.PB7@2106.5,2244.22
VD21: pad.PB8 U1.R6 | length 2144.8
  Top Layer w5: v1@2631.48,2839.92 U1.R6@2647.69,2855.95 ; v1@2633.5,2841.5 U1.R6@2655.24,2848.4 ; v1@2635.79,2842 ccw(c2635.79,2855.28) 2645.18,2845.89 ccw(c2654.57,2836.5) v1@2641.29,2836.5 ; v1@2639.2,2832.19 U1.R6@2655.24,2848.4 ; v1@2640.79,2834.22 U1.R6@2647.69,2855.95 ; U1.R6@2646.54,2852.62 cw(c2633.56,2852.62) 2642.74,2843.45 cw(c2651.91,2834.27) U1.R6@2651.91,2847.25 ; v1(2635.79,2836.5) U1.R6@2651.91,2852.62 ; v1(2635.79,2836.5) U1.R6@2647.69,2855.95 ; v1(2635.79,2836.5) U1.R6@2655.24,2848.4 ; v1(2635.79,2836.5) U1.R6@2651.91,2852.62 ; U1.R6@2651.91,2852.62 2640.12,2833.11 U1.R6@2651.91,2852.62 ; U1.R6@2651.91,2852.62 2632.4,2840.83 U1.R6@2651.91,2852.62
  Bottom Layer w5: pad.PB8@1993.31,2263.28 2040.87,2279.83 ; pad.PB8@1995.22,2258.56 2040.87,2279.83 ; pad.PB8@1997.59,2254.09 2040.87,2279.83 ; pad.PB8@2000.37,2249.9 2040.87,2279.83 ; pad.PB8@2005.26,2244.22 2044.54,2283.5 2100,2283.5 2150,2333.5 2150,2772.86 2190.14,2813 2356,2813 2379.5,2836.5 2400.1,2836.5 2400.6,2837 2548.08,2837 2553.58,2842.5 2566.42,2842.5 2572.42,2836.5 v1(2635.79,2836.5) 2612.79,2836.5 ; pad.PB8@2005.26,2256.72 ccw(c2005.26,2286.9) 2026.6,2265.56 ccw(c2047.94,2244.22) pad.PB8@2017.76,2244.22 ; pad.PB8@2005.26,2261.72 ccw(c2005.26,2303.97) 2035.13,2274.09 ccw(c2065.01,2244.22) pad.PB8@2022.76,2244.22 ; pad.PB8@2005.26,2266.72 ccw(c2005.26,2321.04) 2043.67,2282.63 ccw(c2082.08,2244.22) pad.PB8@2027.76,2244.22 ; pad.PB8@2010.94,2239.33 2040.87,2279.83 ; pad.PB8@2015.13,2236.55 2040.87,2279.83 ; pad.PB8@2019.6,2234.18 2040.87,2279.83 ; pad.PB8@2024.32,2232.27 2040.87,2279.83 ; v1@2631.9,2832.61 ccw(c2622.51,2823.22) 2622.51,2836.5 ccw(c2622.51,2849.78) v1@2631.9,2840.39 ; v1@2635.13,2831.04 2612.79,2836.5 ; v1@2635.13,2841.96 2612.79,2836.5
VD22: pad.PB5 U1.N7 | length 2185.3
  Top Layer w5: v1@2693.09,2809.06 U1.N7@2710.9,2824.71 ; v1@2693.8,2809.72 U1.N7@2712.93,2821.13 ; v1@2694.03,2809.89 U1.N7@2714.9,2821.13 ; v1@2695.12,2810.48 U1.N7@2717.99,2816.73 ; v1@2697.18,2810.88 ccw(c2697.18,2824.16) 2706.57,2814.77 ccw(c2715.96,2805.38) v1@2702.68,2805.38 ; v1@2700.35,2800.89 U1.N7@2717.99,2816.73 ; v1@2701.28,2801.72 U1.N7@2714.9,2821.13 ; v1@2701.52,2802 U1.N7@2712.93,2821.13 ; v1@2702,2802.74 U1.N7@2710.9,2824.71 ; v1@2702.35,2810.55 cw(c2714.9,2798.01) U1.N7@2714.9,2815.75 ; 2707.13,2815.33 ccw(c2701.32,2821.13) U1.N7@2709.53,2821.13 ; v1(2697.18,2805.38) U1.N7@2714.9,2821.13 ; v1(2697.18,2805.38) U1.N7@2710.9,2824.71 ; v1(2697.18,2805.38) U1.N7@2717.99,2816.73 ; v1(2697.18,2805.38) U1.N7@2712.93,2821.13 ; U1.N7@2712.93,2821.13 U1.N7@2714.9,2821.13
  Bottom Layer w5: pad.PB5@2072.05,2184.54 2119.61,2201.09 ; pad.PB5@2073.96,2179.82 2119.61,2201.09 ; pad.PB5@2076.33,2175.35 2119.61,2201.09 ; pad.PB5@2079.11,2171.16 2119.61,2201.09 ; pad.PB5@2084,2165.48 2170,2251.48 2170,2623.5 2170.5,2623.5 ; pad.PB5@2084,2177.98 ccw(c2084,2208.16) 2105.34,2186.82 ccw(c2126.68,2165.48) pad.PB5@2096.5,2165.48 ; pad.PB5@2084,2182.98 ccw(c2084,2225.23) 2113.87,2195.35 ccw(c2143.75,2165.48) pad.PB5@2101.5,2165.48 ; pad.PB5@2084,2187.98 ccw(c2084,2242.3) 2122.41,2203.89 ccw(c2160.82,2165.48) pad.PB5@2106.5,2165.48 ; pad.PB5@2089.68,2160.59 2119.61,2201.09 ; pad.PB5@2093.87,2157.81 2119.61,2201.09 ; pad.PB5@2098.34,2155.44 2119.61,2201.09 ; pad.PB5@2103.06,2153.53 2119.61,2201.09 ; 2170.5,2620.5 2170.5,2623.5 ; v1@2691.68,2805.38 ccw(c2678.4,2805.38) 2687.79,2814.77 ccw(c2697.18,2824.16) v1@2697.18,2810.88 ; v1@2692.84,2802 2681.56,2821 ; v1@2700.55,2809.72 2681.56,2821 ; 2170.5,2623.5 2170.5,2702.36 2199.64,2731.5 2323.38,2731.5 2408.88,2817 2530.14,2817 2547.64,2799.5 2611.58,2799.5 2623.08,2811 2647,2811 2657,2821 2681.56,2821 ; 2681.56,2821 v1(2697.18,2805.38) 2681.56,2821
VD23: pad.PB6 U1.U5 | length 2029.8
  Top Layer w5: pad.PB6@1982.76,2165.48 ccw(c1928.44,2165.48) 1966.85,2203.89 ccw(c2005.26,2242.3) pad.PB6@2005.26,2187.98 ; pad.PB6@1986.2,2153.53 1969.65,2201.09 ; pad.PB6@1987.76,2165.48 ccw(c1945.51,2165.48) 1975.39,2195.35 ccw(c2005.26,2225.23) pad.PB6@2005.26,2182.98 ; pad.PB6@1990.92,2155.44 1969.65,2201.09 ; pad.PB6@1992.76,2165.48 ccw(c1962.58,2165.48) 1983.92,2186.82 ccw(c2005.26,2208.16) pad.PB6@2005.26,2177.98 ; pad.PB6@1995.39,2157.81 1969.65,2201.09 ; pad.PB6@1999.58,2160.59 1969.65,2201.09 ; pad.PB6@2005.26,2165.48 1964,2206.74 1964,2338 1993,2367 2114,2367 2140,2393 ; pad.PB6@2010.15,2171.16 1969.65,2201.09 ; pad.PB6@2012.93,2175.35 1969.65,2201.09 ; pad.PB6@2015.3,2179.82 1969.65,2201.09 ; pad.PB6@2017.21,2184.54 1969.65,2201.09 ; 2135,2388 2140,2393 ; 2575.64,2883.99 ccw(c2575.64,2897.4) U1.U5@2585.12,2887.92 ; 2576.25,2883.99 cw(c2576.25,2871.45) U1.U5@2585.12,2880.32 ; U1.U5@2588.26,2889.45 2566.04,2883.99 ; U1.U5@2588.31,2878.78 2566.04,2883.99 ; 2140,2393 2140,2843.64 2213,2916.64 2530.01,2916.64 2562.66,2883.99 2588.79,2883.99 U1.U5@2588.92,2884.12 2566.04,2883.99
VDD1.25V: C11.1 C20.1 C21.1 C22.1 C23.1 C24.1 C25.1 C39.1 CA2.1 CA3.1 CA4.1 CA5.1 R33.2 U1.A1 U1.A6 U1.A10 U1.A16 U1.B11 U1.F1 U1.F16 U1.G4 U1.J2 U1.J17 U1.L2 U1.M13 U1.N16 U1.T6 U1.T8 U1.U1 U1.U2 U1.U11 U3.1 U3.4 | length 5492.7
  Top Layer w5: v1(2698,2469.5) v1@2698.78,2470.28 ; 2698.78,2491 2698.78,2520.78 ; 2705.19,2527.19 ccw(c2694.72,2537.66) U1.N16@2709.53,2537.66 ; 2707.02,2529.02 cw(c2714.9,2521.14) U1.N16@2714.9,2532.29 ; U1.N16@2710.61,2540.9 2698.78,2520.78 ; U1.N16@2718.34,2533.53 2698.78,2520.78 ; U1.J17@2837.09,2502.36 cw(c2827.91,2493.19) 2840.89,2493.19 cw(c2853.86,2493.19) U1.J17@2844.69,2502.36 ; 2840.89,2472.61 U1.J17@2840.89,2506.16 ; 2698.78,2520.78 U1.N16@2714.9,2537.66 2714.9,2536.9 2698.78,2520.78
  Top Layer w10: 2840.89,2472.61 2858,2455.5 v1(2858,2432.5)
  Top Layer w15: v2@2561.5,2997.5 cw(c2561.5,2979.39) 2574.3,2992.2 cw(c2587.11,3005) v2@2569,3005 ; v1@2563.06,2684.06 cw(c2588.92,2658.2) U1.U11@2588.92,2694.77 ; v1@2566.76,2687.76 cw(c2584.58,2669.93) U1.U11@2588.85,2694.77 ; v2@2567.19,3000.12 cw(c2588.91,2981.48) U1.U1@2588.92,3010.1 ; v1(2698,2469.5) 2698.78,2491 v1@2698.78,2470.28 ; U1.J17@2839.91,2505.19 U1.J17@2840.89,2506.16 ; 2942.44,3017.17 ccw(c2926.62,3033) v1@2949,3033 ; C25.1@3174.83,2717.64 cw(c3164.62,2705.48) v1(3180.5,2705.5) ; v1@3180.5,2707.32 cw(c3195.72,2707.32) C25.1@3184.96,2718.08 ; v2(2561.5,3005) U1.U1@2588.92,3010.1 ; v2(2561.5,3005) U1.U2@2588.92,2978.61 2587.89,2978.61 v2(2561.5,3005) ; v2(2561.5,3005) 2566.6,3010.1 U1.U1@2588.92,3010.1 ; 2574.14,2695.14 U1.U11@2588.92,2695.14 ; 2574.14,2695.14 U1.U11@2588.92,2695.14 ; 2574.14,2695.14 U1.U11@2588.92,2695.14 ; 2574.14,2695.14 v1(2563,2684) U1.U11@2588.92,2695.14 ; U1.U11@2588.92,2695.14 2577.14,2695.14 U1.U11@2588.92,2695.14 ; v1(2825,2963) U1.J2@2840.89,2978.61 ; v1(2825,2963) U1.J2@2840.89,2978.61 ; v1(2825,2963) v1@2825.28,2963 ; v1@2825.28,2963 U1.J2@2840.89,2978.61 ; v1@2825.28,2963 U1.J2@2840.89,2978.61 ; v1(2888,2931) U1.G4@2903.88,2915.61 ; v1(2888,2931) U1.G4@2903.88,2915.61 ; v1(2888,2931) v1@2888.49,2931 ; v1@2888.49,2931 U1.G4@2903.88,2915.61 ; v1@2888.49,2931 U1.G4@2903.88,2915.61 ; v1(3077,2710.78) U1.B11@3061.36,2695.14 v1(3077,2710.78) ; v1(3077,2710.78) U1.A10@3092.85,2726.64 v1(3077,2710.78) ; v1(3180.5,2705.5) C25.1@3179.65,2723.39 3180.5,2722.54 v1(3180.5,2705.5) ; U1.T8@2620.41,2789.63 v1(2636,2773.51) 2636,2774.04 U1.T8@2620.41,2789.63 ; U1.T6@2620.41,2852.62 v1(2636.79,2869) U1.T6@2620.41,2852.62 ; U1.M13@2746.4,2632.15 v1(2762,2647.75) U1.M13@2746.4,2632.15 ; v1(2762.5,2994) U1.L2@2777.89,2978.61 v1(2762.5,2994) ; U1.F16@2935.37,2537.66 v1(2950.71,2553) U1.F16@2935.37,2537.66 ; U1.F1@2935.37,3010.1 v1(2949.5,3033) 2949.5,3024.23 U1.F1@2935.37,3010.1 ; U1.A16@3092.85,2537.66 v1(3121.66,2537.66) U1.A16@3092.85,2537.66 ; U1.A6@3092.85,2852.62 v1(3117,2853) 3116.62,2852.62 U1.A6@3092.85,2852.62 ; U1.A1@3092.85,3010.1 v1(3110,3028) 3110.75,3028 3110.38,3027.62 U1.A1@3092.85,3010.1
  Top Layer w20: v2(2560,3289) 2560,3612 v2(2685,3737)
  SIGNAL_1 w5: 2681,2663 2681.55,2663.55 2746.2,2663.55 ; v1@2756.5,2647.75 ccw(c2743.22,2647.75) 2752.61,2657.14 ccw(c2762,2666.53) v1@2762,2653.25 ; v1@2757.66,2644.37 2746.2,2663.55 ; v1@2765.38,2652.09 2746.2,2663.55 ; 2746.2,2663.55 v1(2762,2647.75) 2746.2,2663.55
  SIGNAL_1 w15: v1@2563.5,2684 ccw(c2596.61,2684) 2573.2,2660.59 ; 2681,2663 2666,2648 2585.79,2648 2563,2670.79 ; 2563,2670.79 v1(2563,2684) ; 2563,2670.79 v1(2563,2684) ; 2563,2670.79 v1(2563,2684)
  SIGNAL_1 w20: v1(2535,2870) 2635.79,2870 v1(2636.79,2869) 2568.73,2870
  SIGNAL_2 w15: v1(2563,2684) v1@2564.5,2682.5
  SIGNAL_2 w20: v2@2562.5,2460 cw(c2627.68,2460) 2581.59,2506.09 ; v1@2563,2682.5 2564.5,2682.5 2581.13,2665.87 2581.13,2574.84 2584.12,2571.85 2584.12,2508.62 2557.5,2482 ; 2557.5,2482 v2(2557.5,2460) 2557.5,2482
  Bottom Layer w5: v1@3120.5,2536.5 v1(3121.66,2537.66)
  Bottom Layer w10: R33.2@2645.61,3738.21 R33.2@2646.82,3737
  Bottom Layer w15: CA5.1@2537.65,3111.61 CA5.1@2538.65,3110.61 CA5.1@2538.65,3104.35 ; CA2.1@2631.74,3110.61 CA2.1@2634.74,3107.61 ; CA2.1@2634.74,3106.24 CA2.1@2634.74,3107.61 ; CA2.1@2639.74,3107.61 C21.1@2699.74,3107.61 ; CA2.1@2645.05,3102.3 cw(c2657.85,3089.5) 2657.85,3107.61 cw(c2657.85,3125.71) CA2.1@2645.05,3112.91 ; C20.1@2673.35,2441.89 2698,2441.89 ; C20.1@2678.22,2449.39 ccw(c2677.88,2469.5) v1(2698,2469.5) ; C20.1@2678.47,2434.39 ccw(c2678.14,2454.25) 2698,2454.25 ; C20.1@2683.65,2436.58 cw(c2696.45,2423.78) 2696.45,2441.89 cw(c2696.45,2459.99) C20.1@2683.65,2447.19 ; C21.1@2703.55,3102.3 ccw(c2690.75,3089.5) 2690.75,3107.61 ccw(c2690.75,3125.71) C21.1@2703.55,3112.91 ; C21.1@2708.55,3102.3 cw(c2695.75,3089.5) 2713.86,3089.5 cw(c2731.96,3089.5) C21.1@2719.16,3102.3 ; 2713.86,3047.61 C21.1@2713.86,3107.61 C21.1@2713.86,3107.38 ; C21.1@2720,3105 2717.62,3107.38 C21.1@2713.86,3107.38 ; 2722.68,3033.82 v1(2762.5,2994) 2713.86,3042.64 C21.1@2713.86,3107.38 ; v1(2949.5,3033) 2972.5,3056 2972.5,3111.77 CA4.1@2971.65,3112.61 ; v1(2950.71,2553) 3003.42,2500.3 3030.31,2500.3 3042.51,2512.5 3096.5,2512.5 ; CA4.1@2966.35,3107.31 cw(c2951.51,3092.46) 2972.5,3092.46 ; 2972.5,3096.55 cw(c2987.72,3096.55) CA4.1@2976.96,3107.31 ; v1(3110,3028) 3110,3098.96 C22.1@3120.65,3109.61 3110,3044.24 ; 3110,3077.86 cw(c3147.41,3077.86) C22.1@3120.96,3104.31 ; v1@3120.5,2536.5 3096.5,2512.5 ; v1@3127.38,2537.66 ccw(c3127.38,2557.09) C23.1@3141.12,2543.35 ; v1@3129.25,2537.66 cw(c3129.25,2520.88) C23.1@3141.12,2532.74 ; C23.1@3146.42,2538.05 v1(3121.66,2537.66) ; C23.1@3151.42,2538.05 C23.1@3151.03,2537.66 ; C23.1@3152.07,2537.66 3151.42,2537.66 C23.1@3151.03,2537.66 ; CA2.1@2634.74,3107.61 2713.62,3107.61 2713.74,3107.49 C21.1@2713.86,3107.38 ; C20.1@2678.35,2441.89 v1(2698,2469.5) ; C20.1@2678.35,2441.89 2698,2441.89 ; C20.1@2678.35,2441.89 v1(2698,2469.5) ; C20.1@2678.35,2441.89 2698,2441.89 ; 2698,2441.89 v1(2698,2469.5) ; 2698,2441.89 v1(2698,2469.5) ; 3096.5,2512.5 v1(3121.66,2537.66) ; v1(3121.66,2537.66) C23.1@3151.03,2537.66 ; CA2.1@2648.86,3107.61 2708.86,3107.61 CA2.1@2648.86,3107.61
  Bottom Layer w20: CA5.1@2538.65,3110.61 2561.5,3087.77 ; CA5.1@2540.12,3107.08 cw(c2488.5,3055.46) 2561.5,3055.46 ; CA5.1@2542.49,3105.75 cw(c2536.69,3081.62) 2561.5,3081.62 ; CA5.1@2548.65,3110.61 ccw(c2572.8,3110.61) 2555.73,3093.54 ; v2(2561.5,3005) 2561.5,3040 ; 2573.69,3052.19 CA2.1@2629.74,3107.61 ; CA2.1@2634.74,3107.61 2629.11,3107.61 2561.5,3040 ; CA5.1@2543.65,3110.61 2561.5,3087.77 ; CA5.1@2543.65,3110.61 2561.5,3040 ; CA5.1@2543.65,3110.61 2561.5,3087.77 ; 2561.5,3040 2561.5,3087.77
  Bottom Layer w25: v2@2559.9,2460.7 ccw(c2586.35,2468.44) C24.1@2586.35,2440.89 ; C24.1@2581.35,2440.89 v2(2557.5,2460) ; C24.1@2587.35,2441.89 C24.1@2586.35,2440.89 ; v2(2557.5,2460) C24.1@2576.61,2440.89 ; v2(2557.5,2460) C24.1@2586.35,2440.89 ; v2(2557.5,2460) C24.1@2576.61,2440.89 ; C24.1@2576.61,2440.89 C24.1@2586.35,2440.89
  Bottom Layer w30: v1@2534.85,2870.15 CA3.1@2494.62,2870.15 v1(2535,2870) ; R33.2@2645.61,3738.21 v2(2685,3737) R33.2@2646.82,3737 ; C24.1@2587.35,2441.89 2668.35,2441.89 2591.35,2440.89 C20.1@2673.35,2441.89 C24.1@2587.35,2441.89
  other v2: 2240,3507.5 2215,3530.93 2282.5,3540 2172.5,3582.5 2282.5,3602.5 2170,3795 2137.5,3822.5
VDD5V: C3.1 C9.1 pad.PA1 pad.PB49 pad.PC55 U4.1 | length 4393.5
  SIGNAL_1 w40: pad.PB49@2084,3897.76 2084,3947 2123,3986 4408,3986 4408,3838.71 pad.PC55@4347.78,3838.71
  SIGNAL_1 w50: pad.PA1@4347.78,2067.06 4408,2127.28 4408,3838.71